# Altium PCB Motor_Driver_HIP4082_TPH1R403_Board_V3.1.PcbDoc
Units mm, origin at the board's own origin, x right, y up, seen from the top; angles counter-clockwise.
Board outline 86 x 46.5 mm, 2 copper layers (Top Layer, Bottom Layer); 59 components, 43 nets, 195 pads, 41 vias.
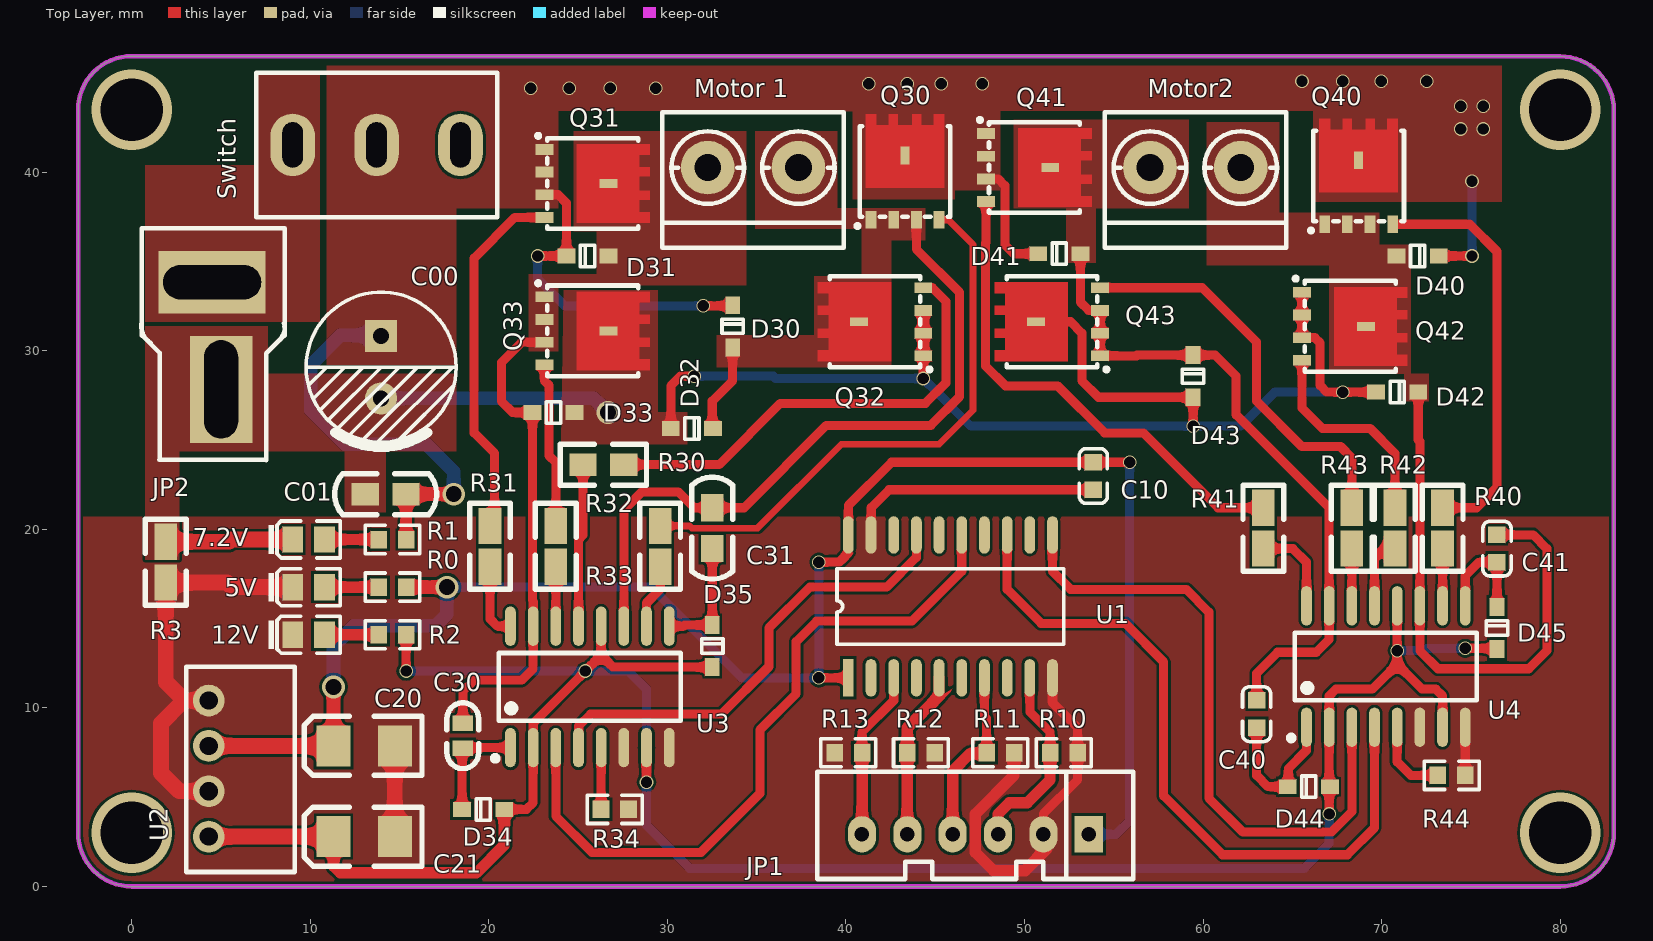
[diagram p0: Top Layer view]
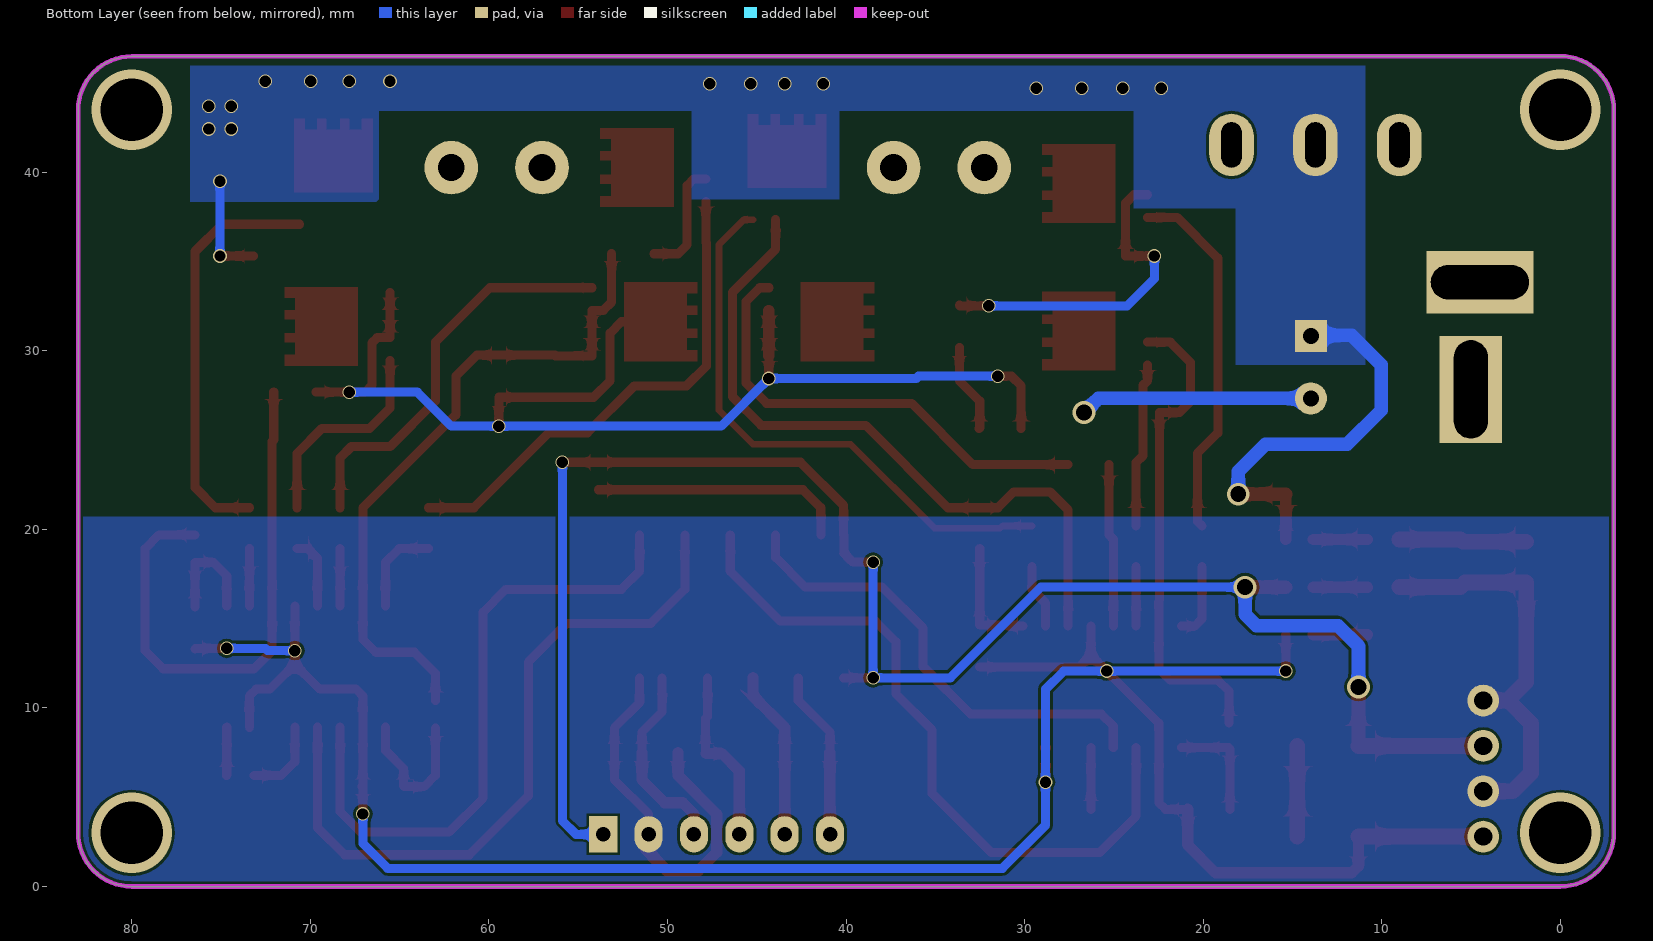
[diagram p1: Bottom Layer view, seen from below]

## Layer stack, top to bottom
Top Solder: solder mask 0.0102, Solder Resist, Dk 3.5
Top Layer: signal copper 0.0356
Dielectric 1: dielectric 0.32, FR-4, Dk 4.8
Bottom Layer: signal copper 0.0356
Bottom Solder: solder mask 0.0102, Solder Resist, Dk 3.5

## Board outline
0,0 cw(c0,3) -3,3 -3,43.5 cw(c0,43.5) 0,46.5 80,46.482 cw(c80,43.482) 83,43.482 83,3 cw(c80,3) 80,0

## Design rules (kind name [scope] priority, off if disabled: settings)
Clearance [All] p1: gap=0.152 ignorepadtopadclearanceinfootprint=FALSE
HoleSize [All] p1 off: absolutevalues=TRUE maxlimit=2.54 minlimit=0.025 maxpercent=80.000 minpercent=20.000
HoleToHoleClearance [All] p1 off: gap=0.254 allowstackedmicrovias=TRUE
MinimumSolderMaskSliver [All] p1 off: minsoldermaskwidth=0.254
PolygonConnect [All] p1: connectstyle=Direct reliefconductorwidth=0.254 reliefentries=4 polygonreliefangle="90 Angle" airgapwidth=0.254
RoutingVias [All] p1: holewidth=0.711 width=1.27 viastyle="Through Hole" minholewidth=0.711 minwidth=1.27 maxholewidth=0.711 maxwidth=1.27
SilkToSilkClearance [All] p1 off: silktosilkclearance=0.254
SilkToSolderMaskClearance [IsPad] p1 off: minsilkscreentomaskgap=0.254 clearancetoexposedcopper=TRUE
SolderMaskExpansion [All] p1: expansion=0.102
Width PWM4 [All] p1: maxlimit=1.27 minlimit=0.254 preferedwidth=0.889
Width PWM3 [InNet('PWM3')] p2: maxlimit=1.27 minlimit=0.254 preferedwidth=0.889
Width PWM2 [InNet('PWM2')] p3: maxlimit=1.27 minlimit=0.254 preferedwidth=0.889
Width PWM1 [InNet('PWM1')] p4: maxlimit=1.27 minlimit=0.254 preferedwidth=0.889
Width [All] p5: maxlimit=0.889 minlimit=0.254 preferedwidth=0.635
25 further rules are at their usual default settings.

## Classes and differential pairs
component class Motor_Driver_HIP4082_TPH1R403_Board_V2.0: 5V 7.2V 12V C01 C10 C20 C21 C30 C40 C41 D30 D31 D32 D33 D34 D35 D40 D41 D42 D43 D44 D45 JP1 JP2 Motor2 "Motor 1" Q30 Q31 Q32 Q33 Q40 Q41 Q42 Q43 R0 R1 R2 R3 R10 R11 R12 R13 R30 R31 R33 R34 R40 R41 R42 R43 R44 U1 U2 U3 U4

## Components (designator, comment, footprint, x,y, rotation, side; value= is the part's Value field where it differs from the comment)
5V "" 0805_LED_S1 9.906,16.764 r0 top
7.2V "" 0805_LED_S1 9.906,19.431 r0 top
12V "" 0805_LED_S1 9.906,14.097 r0 top
C00 "470uF/25V" "CAP 3.5*8*11.5 - BK" 13.97,29.083 r270 top
C01 "100nF" 0805C 13.081,21.971 r0 top
C10 "100nF" 0603_C 53.848,22.987 r270 top
C20 "" 3528 11.303,7.874 r180 top value=4.7uF
C21 "" 3528 11.303,2.794 r180 top value=2.2uF
C30 "1uF" 0603C 18.542,7.747 r90 top
C31 "1uF" 0805C 32.512,18.923 r90 top
C40 "1uF" 0603_C 62.992,9.652 r90 top
C41 "1uF" 0603_C 76.454,18.923 r90 top
D30 "1N5819" SOD-323 33.655,31.369 r270 top
D31 "1N5819" SOD-323 25.527,35.306 r0 top
D32 "1N5819" SOD-323 31.369,25.654 r180 top
D33 "1N5819" SOD-323 23.622,26.543 r0 top
D34 "1N5819" SOD-323 19.685,4.318 r0 top
D35 "1N5819" SOD-323 32.512,13.462 r270 top
D40 "1N5819" SOD-323 72.009,35.306 r180 top
D41 "1N5819" SOD-323 51.943,35.433 r0 top
D42 "1N5819" SOD-323 70.866,27.686 r180 top
D43 "1N5819" SOD-323 59.436,28.575 r270 top
D44 "1N5819" SOD-323 65.913,5.588 r0 top
D45 "1N5819" SOD-323 76.454,14.478 r270 top
JP1 "HEADER 6" SIP6N 53.594,2.921 r180 top
JP2 "HEADER 2" T_Type_Adapter 4.953,29.083 r90 top
Motor2 "HEADER 2" KF301-2P 59.563,40.259 r270 top
"Motor 1" "HEADER 2" KF301-2P 34.798,40.259 r270 top
Q30 "THP1RR403" SOP_Advanced 602.107,-161.417 r0 top
Q31 "THP1RR403" SOP_Advanced -175.641,-519.43 r270 top
Q32 "THP1RR403" SOP_Advanced 243.078,590.423 r90 top
Q33 "THP1RR403" SOP_Advanced -175.641,-527.685 r270 top
Q40 "THP1RR403" SOP_Advanced 627.507,-161.671 r0 top
Q41 "THP1RR403" SOP_Advanced -150.906,-518.541 r270 top
Q42 "THP1RR403" SOP_Advanced -133.223,-527.431 r270 top
Q43 "THP1RR403" SOP_Advanced 252.984,590.423 r90 top
R0 "4.7K" 0603_R 14.605,16.764 r0 top
R1 "4.7K" 0603_R 14.605,19.431 r0 top
R2 "4.7K" 0603_R 14.605,14.097 r0 top
R3 "0" 0805 1.905,19.304 r270 top
R10 "10K" 0603_R 52.197,7.493 r0 top
R11 "10K" 0603_R 48.641,7.493 r180 top
R12 "10K" 0603_R 44.196,7.493 r0 top
R13 "10K" 0603_R 40.132,7.493 r180 top
R30 "10" 0805 29.591,20.193 r270 top
R31 "10" 0805 20.066,20.193 r270 top
R32 "10" 0805R 27.559,23.622 r180 top
R33 "10" 0805 23.749,17.907 r90 top
R34 "10K" 0603_R 27.051,4.318 r180 top
R40 "10" 0805 73.406,21.209 r270 top
R41 "10" 0805 63.373,21.209 r270 top
R42 "10" 0805 70.739,21.209 r270 top
R43 "10" 0805 68.326,18.923 r90 top
R44 "10K" 0603_R 73.914,6.223 r180 top
Switch "HEADER 2" key 13.715,41.529 r180 top
U1 "74HC245" SOP20 40.132,11.684 r90 top
U2 "B0512S-1W" SIP4_B_S-1W 3.048,0.813 r0 top
U3 "HIP4082" SOP-16_208mil 25.654,11.176 r0 top
U4 "HIP4082" SOP-16_208mil 70.231,12.319 r0 top

## Footprints (in the part's own frame and the unit in brackets; to place one, negate y for a bottom-side part, rotate by r counter-clockwise, add the part's x,y. Pads: shape width x height; smd on the part's side, far side on the other; paste and mask are expansions set on the pad)
0603_C [mm]
  rect 0.93x0.98 smd: 1(-0.77,0) 2(0.77,0)
  silkscreen extent -1.53,-0.79 1.54,0.79, body extent -0.8,-0.4 0.8,0.4, height 0.3
0603_R [mm]
  rect 0.93x0.98 smd: 1(-0.77,0) 2(0.77,0)
  silkscreen extent -1.53,-0.79 1.54,0.79, body extent -0.85,-0.4 0.85,0.4, height 0.56
0603C [mil]
  rect 34x45 smd: 1(0,0) 2(55,0)
  silkscreen extent -45,-35 100,35, body extent -3,-18 60,16, height 37
0805 [mil]
  rect 80x50 smd: 1(0,0) 2(90,0)
  silkscreen extent -50,-45 140,45, body extent 0,-27 90,27, height 30
0805_LED_S1 [mm]
  rect 1.16x1.47 smd: A(0.89,0) K(-0.89,0)
  silkscreen extent -2.25,-1.04 1.77,1.03, body extent -1.01,-0.62 1.01,0.62, height 1.1
0805C [mil]
  rect 60x50 smd: 1(0,0) 2(90,0)
  silkscreen extent -67,-45 157,45, body extent 6,-26 84,26, height 29
0805R [mil]
  rect 60x50 smd: 1(0,0) 2(90,0)
  silkscreen extent -50,-45 140,45, body extent 1,-26 91,28, height 30
3528 [mil]
  rect 75x90 smd: 1(0,0) 2(-135,0)
  silkscreen extent -195,-65 65,65, body extent -141,-57 5,59, height 80
"CAP 3.5*8*11.5 - BK" [mm] "脚距3.5mm直径8mm高度11.5mm"
  rect 1.8x1.8 hole 0.9: 1(-1.75,0)
  round 1.8 hole 0.9: 2(1.75,0)
  silkscreen extent -4.2,-4.2 4.5,4.2, body extent -4,-4 4.01,4, height 11.54
key [mm]
  oval 2.5x3.5 hole 1.143 slot 2.54 at 90 deg: 1(4.7,0) 2(0,0) 3(-4.7,0)
  silkscreen extent -6.75,-4.05 6.75,4.05
KF301-2P [mm]
  round 3 hole 1.5: 1(0,-2.54) 2(0,2.54)
  silkscreen extent -3.1,-5.08 4.5,5.08
SIP4_B_S-1W [mil]
  round 70 hole 40: 1(50,378) 2(50,278) 3(50,178) 4(50,78)
  silkscreen extent 0,0 240,453
SIP6N [mil]
  rect 62x80 hole 32: 1(0,0)
  oval 62x80 hole 32: 2(100,0) 3(200,0) 4(300,0) 5(400,0) 6(500,0)
  silkscreen extent -98,-138 598,98, body extent -99,-129 597,95, height 277
SOD-323 [mm]
  rect 1x0.83 smd: 1(1.18,0) 2(-1.18,0)
  silkscreen extent -0.4,-0.6 0.4,0.6, body extent -1.35,-0.62 1.35,0.63, height 1.1
SOP20 [mm]
  rect 2.1x0.6 smd: 1(0,0)
  oval 2.1x0.6 smd: 2(0,-1.27) 3(0,-2.54) 4(0,-3.81) 5(0,-5.08) 6(0,-6.35) 7(0,-7.62) 8(0,-8.89) 9(0,-10.16) 10(0,-11.43) 11(8,-11.43) 12(8,-10.16) 13(8,-8.89) 14(8,-7.62) 15(8,-6.35) 16(8,-5.08) 17(8,-3.81) 18(8,-2.54) 19(8,-1.27) 20(8,0)
  silkscreen extent 1.89,-12.06 6.11,0.64
SOP-16_208mil [mm]
  oval 0.6x2.2 smd: 1(-4.445,-3.4) 2(-3.175,-3.4) 3(-1.905,-3.4) 4(-0.635,-3.4) 5(0.635,-3.4) 6(1.905,-3.4) 7(3.175,-3.4) 8(4.445,-3.4) 9(4.445,3.4) 10(3.175,3.4) 11(1.905,3.4) 12(0.635,3.4) 13(-0.635,3.4) 14(-1.905,3.4) 15(-3.175,3.4) 16(-4.445,3.4)
  silkscreen extent -5.45,-4.15 5.1,1.9
SOP_Advanced [mm]
  rect 0.5x1 smd: 1(-558.8,202.341)
  rect 0.6x1 smd: 2(-556.895,198.755) 3(-560.705,198.755) 3(-559.435,198.755) 3(-558.165,198.755)
  Top Layer region: -561,200.555 -561,204.655 -560.4,204.655 -560.4,204.055 -559.7,204.055 -559.7,204.655 -559.2,204.655 -559.2,204.055 -558.4,204.055 -558.4,204.655 -557.9,204.655 -557.9,204.055 -557.2,204.055 -557.2,204.655 -556.6,204.655 -556.6,200.555
  silkscreen extent -561.57,198.3 -556.26,203.99
T_Type_Adapter [mm]
  rect 6x3.5 hole 1.905 slot 5.49 at 0 deg: 1(-1.245,-0.051)
  rect 3.5x6 hole 1.905 slot 5.49 at 90 deg: 2(4.755,0.449)
  silkscreen extent -5.21,-3.61 7.77,4.42

## Part data
5V 7.2V 12V: library part LED
C00: library part CAPACITOR, "Capacitor"
C01 C10 C30 C31 C40 C41: library part CAP, "Capacitor"
C20 C21: library part "Cap Pol3", "Polarized Capacitor (Surface Mount)", LatestRevisionDate=29-May-2009, LatestRevisionNote="IPC-7351 Footprint Added.", PackageDescription="Chip Capacitor", PackageReference=C0805, Published=8-Jun-2000, Publisher="Altium Limited"
D30 D31 D32 D33 D34 D35 D40 D41 D42 D43 D44 D45: library part "DIODE SCHOTTKY", "Schottky Diode"
Q30 Q31 Q32 Q33 Q40 Q41 Q42 Q43: library part MOSFET-N, "N-Channel MOSFET", PackageDocument=1995/1996, LatestRevisionDate=17-Jul-2002, LatestRevisionNote="Re-released for DXP Platform.", PackageReference=E3, Published=8-Jun-2000, Publisher="Altium Limited"
R0 R1 R2 R3 R10 R11 R12 R13 R30 R31 R32 R33 R34 R40 R41 R42 R43 R44: library part RES2
U2: library part "4 HEADER", "4 Pin Header"

## Via types
v1: diameter 0.762, hole 0.635, Top Layer to Bottom Layer, 33 vias
v2: diameter 4.5, hole 3.5, Top Layer to Bottom Layer, 4 vias
v3: diameter 1.27, hole 0.889, Top Layer to Bottom Layer, 4 vias

## Nets (pads, with @x,y where several pads share a name; then routed paths per layer and width w, separated by ;. In a path a pad name is that pad's centre, name@x,y a point inside that pad or via, vN(x,y) a via of type N, cw(c..) or ccw(c..) an arc to the next point about the centre after c; other vN are vias at no path point)
5V: C10.1 C20.1 JP1.1 R0.2 U1.1 U1.20 U2.2 | length 98.5
  Top Layer w0.508: v1(38.481,11.684) U1.1 ; v1(38.481,18.161) 39.624,18.161 40.114,18.651 40.114,19.666 U1.20 40.132,21.336 42.553,23.757 C10.1 55.872,23.757 v1(55.88,23.749)
  Top Layer w0.762: C20.1 v3(11.303,11.176) ; R0.2 v3(17.653,16.764)
  Top Layer w0.889: U2.2 C20.1
  Bottom Layer w0.508: v3(17.653,16.764) 29.083,16.764 34.163,11.684 v1(38.481,11.684) v1(38.481,18.161) ; JP1.1 55.118,2.921 55.88,3.683 v1(55.88,23.749)
  Bottom Layer w0.762: v3(11.303,11.176) 11.303,13.462 12.446,14.605 17.018,14.605 17.653,15.24 v3(17.653,16.764)
7.2V: C00.1 C01.2 D30.2 D31.2 D40.2 D41.2 Q30.1 Q31.3 Q40.1 Q41.3 R1.2 Switch.2 | length 54.6
  Top Layer w0.508: v1(22.733,35.306) D31.2 24.347,38.264 23.876,38.735 Q31.3@23.114,38.735 ; v1(32.004,32.512) 33.618,32.512 D30.2 ; Q41.3@47.849,39.624 48.514,39.624 48.895,39.243 48.895,35.941 49.403,35.433 D41.2 ; D40.2 v1(75.057,35.306)
  Top Layer w0.635: C01.2 15.367,19.439 R1.2
  Top Layer w0.762: C01.2 v3(18.034,21.971)
  Bottom Layer w0.508: v1(22.733,35.306) 22.733,34.036 24.257,32.512 v1(32.004,32.512) ; v1(75.057,35.306) v1(75.057,39.497)
  Bottom Layer w0.762: C00.1 13.942,30.861 11.684,30.861 10.033,29.21 10.033,26.67 11.938,24.765 16.51,24.765 18.034,23.241 v3(18.034,21.971)
  other v1: 74.422,42.418 75.692,42.418 74.422,43.688 75.692,43.688 22.352,44.704 24.511,44.704 26.797,44.704 29.337,44.704 41.275,44.958 43.434,44.958 45.339,44.958 47.625,44.958 65.532,45.085 67.818,45.085 69.977,45.085 72.517,45.085
"7.2V In": JP2.2 Switch.1
12V: C21.1 D34.1 D35.1 D44.1 D45.1 R2.2 U2.4 U3.2 U3.7 U3.12 U4.2 U4.7 U4.12 | length 132.8
  Top Layer w0.508: v1(15.367,12.065) 15.367,14.089 R2.2 ; D34.1 22.098,4.318 22.479,4.699 U3.2 22.479,9.144 v1(25.4,12.065) 26.289,12.954 ; U3.12 26.289,12.954 ; v1(28.829,5.842) U3.7 ; D35.1 26.961,12.282 26.289,12.954 ; v1(67.056,4.064) 67.056,5.551 D44.1 67.056,5.625 U4.2 67.056,10.668 67.437,11.049 69.469,11.049 70.866,12.446 ; U4.12 v1(70.866,13.208) 70.866,12.446 ; U4.7 73.406,10.668 73.025,11.049 72.263,11.049 70.866,12.446 ; v1(74.676,13.335) 76.417,13.335 D45.1
  Top Layer w0.635: C21.1 11.303,1.143 11.684,0.762 19.304,0.762 20.865,2.323 D34.1
  Top Layer w0.889: U2.4 C21.1
  Bottom Layer w0.508: v1(15.367,12.065) v1(25.4,12.065) 27.813,12.065 28.829,11.049 v1(28.829,5.842) 28.829,3.429 31.242,1.016 65.659,1.016 67.056,2.413 v1(67.056,4.064) ; v1(70.866,13.208) 72.39,13.208 72.517,13.335 v1(74.676,13.335)
AHO1: R30.2 U3.10 | length 3.6
  Top Layer w0.508: U3.10 28.829,15.875 29.591,16.637 R30.2
AHO2: R40.2 U4.10 | length 3.2
  Top Layer w0.508: U4.10 R40.2
AHS1: "Motor 1.2" C31.2 D30.1 D32.2 Q30.3 Q32.1 U3.11 | length 44.6
  Top Layer w0.508: U3.11 27.559,21.082 28.575,22.098 30.607,22.098 31.496,21.209 C31.2 34.29,21.209 38.906,25.825 44.748,25.825 46.355,27.432 46.355,33.274 43.942,35.687 Q30.3@43.942,37.338 ; D32.2 32.512,25.691 32.512,27.178 33.655,28.321 D30.1
AHS2: C41.2 D40.1 D42.2 Motor2.2 Q40.3 Q42.1 U4.11 | length 31.3
  Top Layer w0.508: D42.2 72.046,25.019 72.136,24.929 U4.11 72.136,13.208 73.152,12.192 78.232,12.192 79.248,13.208 79.248,18.923 78.478,19.693 C41.2
ALO1: R32.2 U3.13 | length 9.2
  Top Layer w0.508: U3.13 25.019,19.431 25.273,19.685 R32.2
ALO2: R42.2 U4.13 | length 4
  Top Layer w0.508: U4.13 69.596,18.371 70.148,18.923 R42.2
BHO1: R31.2 U3.16 | length 4.2
  Top Layer w0.508: R31.2 20.066,14.986 20.476,14.576 U3.16
BHO2: R41.2 U4.16 | length 5.2
  Top Layer w0.508: R41.2 65.024,18.923 65.786,18.161 U4.16
BHS1: "Motor 1.1" C30.2 D31.1 D33.2 Q31.1 Q33.3 U3.15 | length 27.7
  Top Layer w0.508: C30.2 18.542,10.922 19.177,11.557 21.844,11.557 22.479,12.192 U3.15 22.479,16.002 22.442,16.039 D33.2 21.336,26.543 20.701,27.178 20.701,29.337 21.844,30.48 Q33.3@23.114,30.48
BHS2: C40.2 D41.1 D43.2 Motor2.1 Q41.1 Q43.3 U4.15 | length 37.9
  Top Layer w0.508: D41.1 53.123,32.729 53.594,32.258 54.229,32.258 54.229,30.988 54.229,29.718 56.261,29.718 56.298,29.755 D43.2 60.669,29.755 61.849,28.575 61.849,26.416 67.056,21.209 U4.15 67.056,13.843 66.331,13.118 64.172,13.118 62.992,11.938 C40.2
BLO1: R33.1 U3.14 | length 3.3
  Top Layer w0.508: U3.14 R33.1
BLO2: R43.1 U4.14 | length 3.2
  Top Layer w0.508: U4.14 R43.1
GND: 5V.K 12V.K C10.2 C20.2 C21.2 JP1.2 R3.2 R10.2 R11.1 R12.2 R13.2 R34.1 R44.1 U1.10 U1.19 U2.1 U2.3 U3.6 U3.8 U4.6 U4.8 | length 67.6
  Top Layer w0.508: U1.19 41.402,21.209 42.41,22.217 C10.2 ; JP1.2 51.054,4.064 52.967,5.977 R10.2 52.967,8.882 51.562,10.287 U1.10 ; U4.8 74.676,6.231 R44.1
  Top Layer w0.635: R11.1 49.411,6.231 47.244,4.064 47.244,1.905 48.26,0.889 50.038,0.889 51.054,1.905 JP1.2
  Top Layer w0.889: 2.81,10.303 1.651,9.144 1.651,6.35 2.667,5.334 U2.3 ; U2.1 2.921,10.414 2.937,10.43 1.905,11.462 R3.2 5.334,17.018 5.588,16.764 5V.K ; C21.2 C20.2
"Motor In1": U1.17 U3.4 | length 26.6
  Top Layer w0.508: U3.4 25.037,7.794 25.037,8.991 25.698,9.652 33.02,9.652 35.687,12.319 35.687,14.478 37.973,16.764 42.274,16.764 43.942,18.432 U1.17
"Motor In2": U1.15 U3.3 | length 39.8
  Top Layer w0.508: U3.3 23.749,3.937 25.781,1.905 31.877,1.905 35.179,5.207 35.179,8.763 37.211,10.795 37.211,13.716 38.354,14.859 43.688,14.859 46.482,17.653 U1.15
"Motor In3": U1.13 U4.4 | length 40.4
  Top Layer w0.508: U1.13 49.022,16.637 50.927,14.732 55.626,14.732 57.785,12.573 57.785,5.08 61.087,1.778 68.072,1.778 69.596,3.302 U4.4
"Motor In4": U1.11 U4.3 | length 36.1
  Top Layer w0.508: U1.11 51.562,17.653 52.578,16.637 59.055,16.637 60.325,15.367 60.325,4.953 62.23,3.048 67.183,3.048 68.326,4.191 U4.3
Net5V_A: 5V.A R0.1 | length 3
  Top Layer w0.635: 5V.A R0.1
Net7.2V_A: 7.2V.A R1.1 | length 3
  Top Layer w0.635: 7.2V.A R1.1
Net12V_A: 12V.A R2.1 | length 3
  Top Layer w0.635: 12V.A R2.1
NetC30_1: C30.1 D34.2 U3.1 | length 6.1
  Top Layer w0.508: D34.2 18.505,7.71 C30.1 18.571,7.776 U3.1
NetC31_1: C31.1 D35.2 U3.9 | length 6.7
  Top Layer w0.508: U3.9 30.922,14.576 30.988,14.642 D35.2 C31.1
NetC40_1: C40.1 D44.2 U4.1 | length 8.4
  Top Layer w0.508: C40.1 62.992,6.223 63.627,5.588 D44.2 64.77,5.625 64.77,6.604 65.786,7.62 U4.1
NetC41_1: C41.1 D45.2 U4.9 | length 6.3
  Top Layer w0.508: U4.9 74.676,17.399 75.43,18.153 C41.1 D45.2
NetQ30_2: Q30.2 R30.1 | length 32.1
  Top Layer w0.381: R30.1 31.242,20.193 31.369,20.066 35.052,20.066 39.751,24.765 45.212,24.765 47.117,26.67 47.117,35.941 45.72,37.338 Q30.2
NetQ31_2: Q31.2 R31.1 | length 20.4
  Top Layer w0.508: R31.1 20.32,20.447 20.32,24.257 19.177,25.4 19.177,35.179 21.463,37.465 Q31.2
NetQ32_2: Q32.2 R32.1 | length 26.1
  Top Layer w0.508: R32.1 32.893,23.622 36.322,27.051 44.45,27.051 45.593,28.194 45.593,32.766 44.831,33.528 Q32.2
NetQ33_2: Q33.2 R33.2 | length 9.3
  Top Layer w0.508: Q33.2 23.114,28.321 23.368,28.067 23.368,24.13 23.749,23.749 R33.2
NetQ40_2: Q40.2 R40.1 | length 23.2
  Top Layer w0.508: Q40.2 74.93,37.084 76.454,35.56 76.454,22.352 75.311,21.209 R40.1
NetQ41_2: Q41.2 R41.1 | length 28.1
  Top Layer w0.508: Q41.2 47.849,36.068 47.821,36.04 47.821,29.141 48.937,28.025 51.858,28.025 54.483,25.4 56.642,25.4 60.833,21.209 R41.1
NetQ42_2: Q42.2 R42.1 | length 12
  Top Layer w0.508: Q42.2 65.532,26.797 66.675,25.654 69.342,25.654 70.739,24.257 R42.1
NetQ43_2: Q43.2 R43.2 | length 22.8
  Top Layer w0.508: Q43.2 59.944,33.528 62.992,30.48 62.992,27.178 65.532,24.638 67.691,24.638 68.326,24.003 R43.2
NetR34_2: R34.2 U3.5 | length 3.5
  Top Layer w0.508: R34.2 26.289,4.326 U3.5
NetR44_2: R44.2 U4.5 | length 4.5
  Top Layer w0.508: U4.5 70.866,6.985 71.628,6.223 R44.2
PGND: 7.2V.K C00.2 C01.1 D32.1 D33.1 D42.1 D43.1 JP2.1 Q32.3 Q33.1 Q42.3 Q43.1 R3.1 | length 89.2
  Top Layer w0.508: D32.1 30.189,28.03 30.734,28.575 v1(31.496,28.575) ; v1(44.323,28.448) Q32.3@44.323,29.718 ; Q43.1 52.578,31.623 53.213,30.988 53.213,28.321 54.139,27.395 D43.1 v1(59.436,25.781) ; Q42.3@65.532,33.274 65.532,32.004 65.532,30.734 66.25,30.734 66.548,30.436 66.548,28.067 66.929,27.686 v1(67.818,27.686) D42.1
  Top Layer w0.635: Q32.3@44.323,29.718 44.323,30.988 Q32.3@44.323,32.258
  Top Layer w0.889: R3.1 5.461,19.304 5.588,19.431 7.2V.K
  Bottom Layer w0.508: v1(31.496,28.575) 35.941,28.575 36.068,28.448 v1(44.323,28.448) 46.99,25.781 v1(59.436,25.781) 62.103,25.781 64.008,27.686 v1(67.818,27.686)
  Bottom Layer w0.762: C00.2 25.88,27.333 v3(26.67,26.543)
PWM1: JP1.6 R13.1 U1.3 | length 9.5
  Top Layer w0.508: JP1.6 JP1.6@40.902,2.929 ; R13.1 40.894,7.501 40.894,8.636 42.672,10.414 U1.3
  Top Layer w0.635: JP1.6@40.902,2.929 R13.1
PWM2: JP1.5 R12.1 U1.5 | length 9.5
  Top Layer w0.635: JP1.5 43.426,2.929 R12.1 43.434,7.501 43.434,8.89 45.212,10.668 U1.5
PWM3: JP1.4 R11.2 U1.7 | length 10.1
  Top Layer w0.508: U1.7 47.752,9.525 47.871,9.406 R11.2 R11.2@47.823,7.445
  Top Layer w0.635: JP1.4 45.974,6.477 46.942,7.445 R11.2@47.823,7.445
PWM4: JP1.3 R10.1 U1.9 | length 11
  Top Layer w0.508: U1.9 50.292,9.779 51.427,8.644 R10.1
  Top Layer w0.635: JP1.3 48.514,4.064 49.149,4.699 50.165,4.699 51.427,5.961 R10.1
pads on no net: Switch.3 U1.2 U1.4 U1.6 U1.8 U1.12 U1.14 U1.16 U1.18
copper on no net:
  other v2: 0,3 80,3 0,43.5 80,43.5

## Polygon pours and split planes (outlines as drawn)
GND on Top Layer "Top Layer-No Net" (solid, remove dead copper, pour order 48): -6.223,20.701 90.043,20.701 90.17,20.574 88.265,18.669 88.265,-5.588 -2.667,-5.588 -3.683,-4.572
PGND on Top Layer "Top Layer-No Net" (solid, remove dead copper, pour order 28): 24.194,33.401 29.464,33.401 29.464,26.543 31.115,26.543 31.115,24.765 24.066,24.765
no net on Top Layer "Top Layer-No Net" (solid, remove dead copper, pour order 26): 24.511,33.274
PGND on Top Layer "Top Layer-No Net" (solid, remove dead copper, pour order 24): 11.938,20.955 14.224,20.955 14.224,26.035 15.494,26.035 15.494,28.575 11.938,28.575
PGND on Top Layer "Top Layer-No Net" (solid, remove dead copper, pour order 22): 0.762,18.288 2.667,18.288 2.667,24.384 18.161,24.384 18.161,28.702 7.62,28.702 7.62,31.369 0.762,31.369
AHS1 on Top Layer "Top Layer-No Net" (solid, remove dead copper, pour order 20): 34.925,42.291 34.925,36.83 44.45,36.83 44.45,37.973 39.497,37.973 39.497,42.291
no net on Top Layer "Top Layer-No Net" (solid, remove dead copper, pour order 18): 35.687,42.291
BHS2 on Top Layer "Top Layer-No Net" (solid, remove dead copper, pour order 16): 59.182,37.973 53.975,37.973 53.975,34.925 52.324,34.925 52.324,37.973 49.403,37.973 49.403,42.926 59.182,42.926
BHS1 on Top Layer "Top Layer-No Net" (solid, remove dead copper, pour order 12): 34.417,42.291 24.765,42.291 24.765,36.703 26.035,36.703 26.035,34.29 22.225,34.29 22.225,29.972 23.876,29.972 23.876,33.655 34.417,33.655
"7.2V In" on Top Layer "Top Layer-No Net" (solid, remove dead copper, pour order 6): 6.985,45.593 10.541,45.593 10.541,31.623 0.762,31.623 0.762,40.386 6.985,40.386
AHS1 on Top Layer "Top Layer-No Net" (solid, remove dead copper, pour order 4): 42.545,29.083 32.766,29.083 32.766,30.861 38.227,30.861 38.227,34.163 40.894,34.163 40.894,38.1 41.021,37.973 44.45,37.973 44.45,36.195 42.545,36.195
7.2V on Top Layer "Top Layer-No Net" (solid, remove dead copper, pour order 2): 66.167,38.354 76.708,38.354 76.708,38.481 76.708,45.974 10.922,45.974 10.922,29.21 18.161,29.21 18.161,37.973 23.876,37.973 23.876,43.434 40.386,43.386 40.386,38.481 46.101,38.481 46.101,38.989 48.641,38.989 48.641,43.434 49.022,43.434 66.167,43.434
AHS2 on Top Layer "Top Layer-No Net" (solid, remove dead copper, pour order 0): 60.198,42.799 64.262,42.799 64.262,37.719 69.85,37.719 69.85,35.941 71.628,35.941 71.628,28.702 72.644,28.702 72.644,27.178 71.247,27.178 71.247,28.702 67.056,28.702 67.056,34.798 60.198,34.798
GND on Bottom Layer "Top Layer-No Net" (solid, remove dead copper, pour order 46): -7.62,20.701 87.249,20.701 87.249,-3.048 86.36,-2.159 -8.636,-2.159
7.2V on Bottom Layer "Top Layer-No Net" (solid, remove dead copper, pour order 44): 10.922,45.974 10.922,29.21 18.161,29.21 18.161,37.973 23.876,37.973 23.876,43.434 40.386,43.434 40.386,38.481 48.641,38.481 48.641,43.434 66.167,43.434 66.167,38.481 66.294,38.354 76.708,38.354 76.708,45.974

## Keep-outs
Keep-Out Layer:
  lines w0.254: 83,43.482 ccw(c80,43.482) 80,46.482 0,46.5 ccw(c0,43.5) -3,43.5 -3,3 ccw(c0,3) 0,0 80,0 ccw(c80,3) 83,3 83,43.5

## Silkscreen, mask and mechanical layers (free items; w line width, h text height)
Top Solder:
  text "2022.2.17" at 82.448,27.432 h1.52 r90
  text "OnTheWay" at 79.629,27.127 h1.52 r90
  text "合肥工业大学" at 78.054,26.289 h1.52 r90
  text "十七届四轮摄像头" at 81.128,25.476 h1.52 r90